# Altium PCB PCB5.PcbDoc
Units mil, origin at the board's own origin, x right, y up, seen from the top; angles counter-clockwise.
Board outline 6000 x 4000 mil, 2 copper layers (Top Layer, Bottom Layer); 16 components, 15 nets, 60 pads, 9 vias.
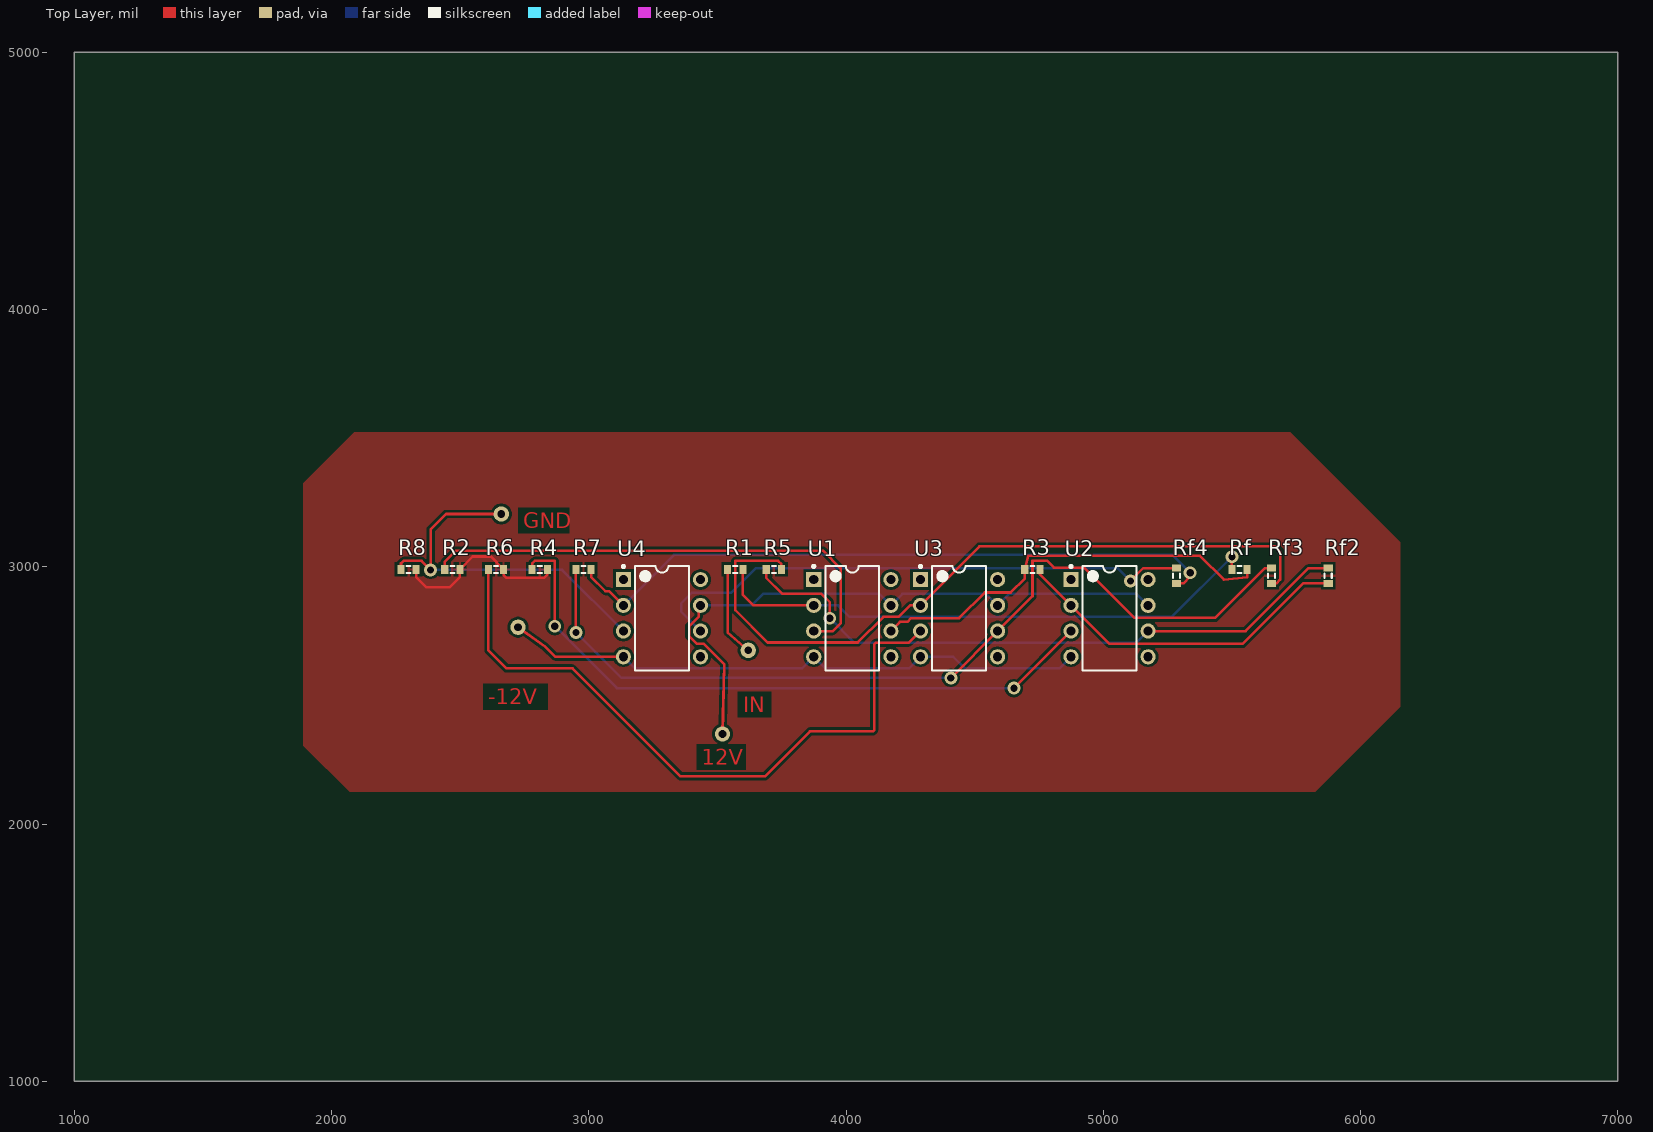
[diagram p0: Top Layer view]
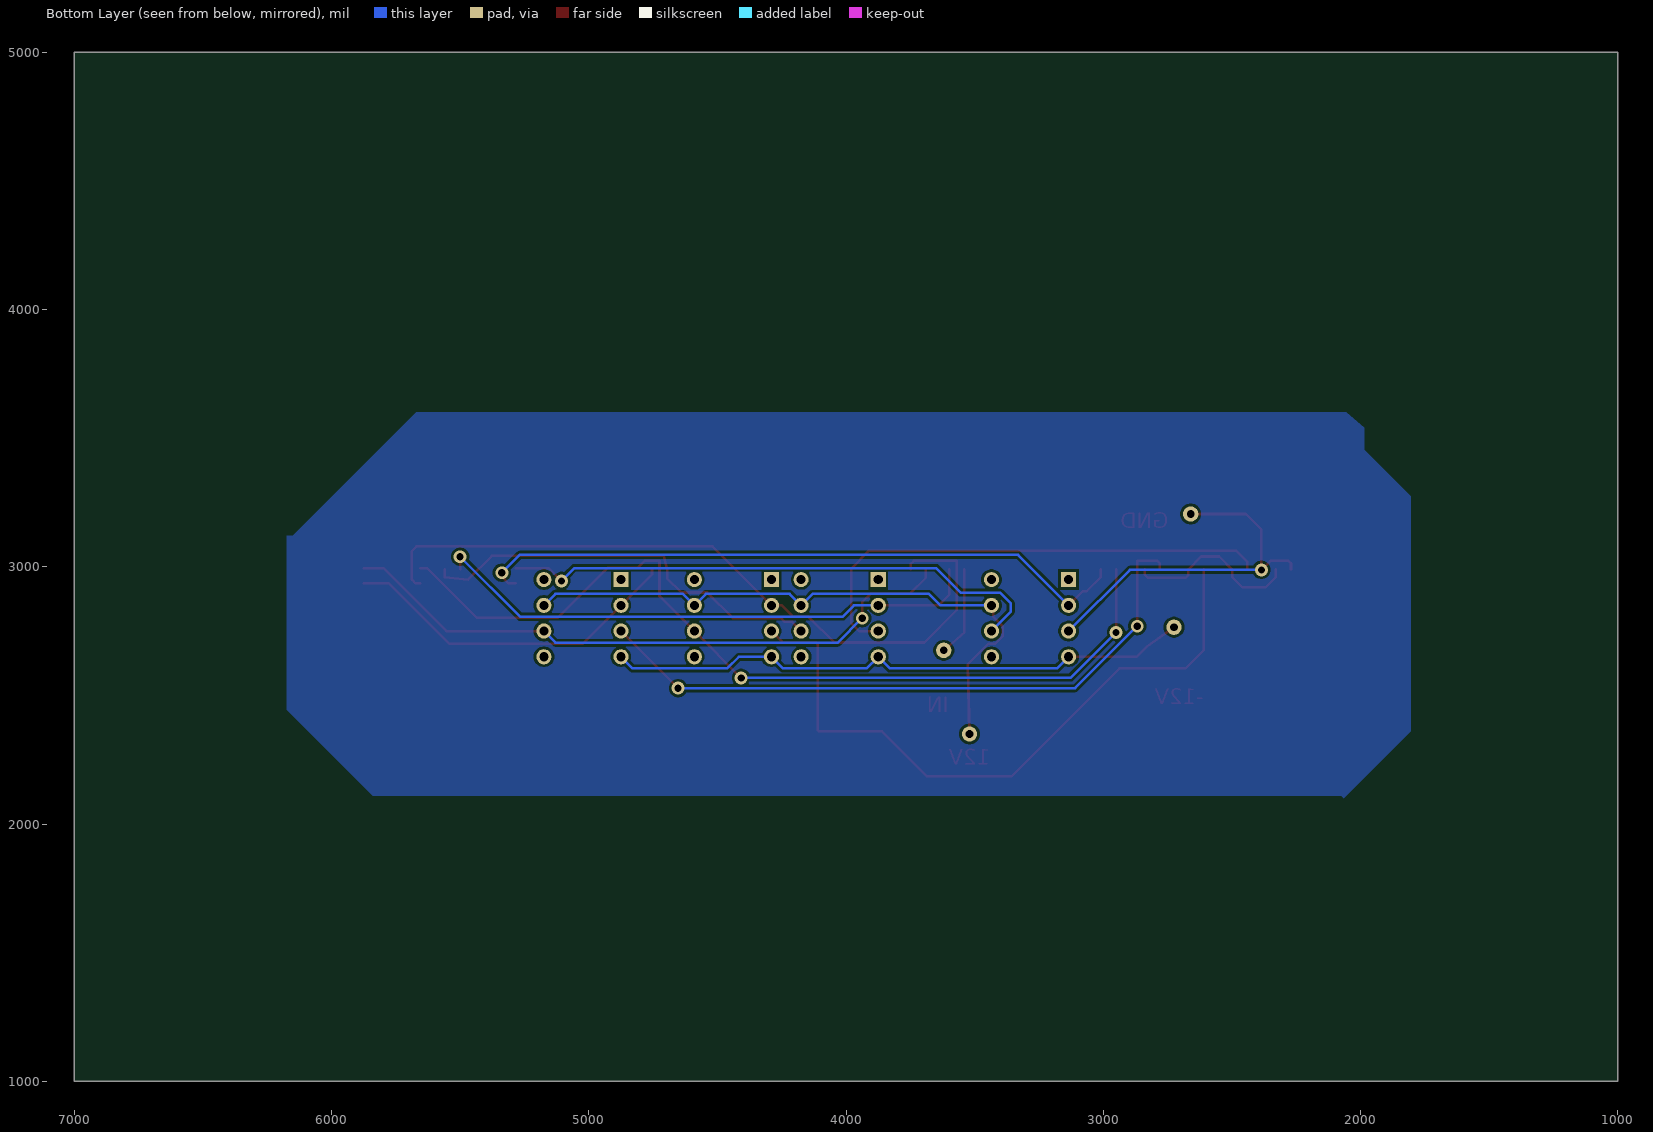
[diagram p1: Bottom Layer view, seen from below]

## Layer stack, top to bottom
Top Solder: solder mask 0.4, Solder Resist, Dk 3.5
Top Layer: signal copper 1.4
Dielectric 1: dielectric 12.6, FR-4, Dk 4.8
Bottom Layer: signal copper 1.4
Bottom Solder: solder mask 0.4, Solder Resist, Dk 3.5

## Board outline
1000,1000 7000,1000 7000,5000 1000,5000

## Design rules (kind name [scope] priority, off if disabled: settings)
Clearance [All] p1: gap=10 ignorepadtopadclearanceinfootprint=FALSE except(0: Arc-Hole Track-Hole SMDPad-Hole THPad-Hole Via-Hole Fill-Hole Poly-Hole Region-Hole Text-Hole)
PolygonConnect [All] p1: connectstyle=Relief reliefconductorwidth=10 reliefentries=4 polygonreliefangle="90 Angle" airgapwidth=10
RoomDefinition Sheet1 [InComponentClass('Sheet1')] p1: confinementstyle=ConfineIn formatcopy=TRUE lockcomponents=FALSE outline 2244.53,2585 6029.53,2585 6029.53,3120 2244.53,3120
RoutingVias [All] p1: holewidth=28 width=50 viastyle="Through Hole" minholewidth=28 minwidth=50 maxholewidth=28 maxwidth=50
SolderMaskExpansion [All] p1: expansion=4 istentingtop=FALSE
Width [All] p1: maxlimit=10 minlimit=10 preferedwidth=10
30 further rules are at their usual default settings.

## Components (designator, comment, footprint, x,y, rotation, side; value= is the part's Value field where it differs from the comment)
R1 "Res3" J1-0603 3569.53,2990 r0 top value=10K
R2 "Res3" J1-0603 2469.53,2990 r0 top value=9.1K
R3 "Res3" J1-0603 4724.53,2990 r0 top value=10K
R4 "Res3" J1-0603 2809.53,2990 r0 top value=9.1K
R5 "Res3" J1-0603 3719.53,2990 r0 top value=10K
R6 "Res3" J1-0603 2639.53,2990 r0 top value=9.1K
R7 "Res3" J1-0603 2979.53,2990 r0 top value=10K
R8 "Res3" J1-0603 2299.53,2990 r0 top value=9.1K
Rf "Res3" J1-0603 5529.53,2990 r0 top value=100K
Rf2 "Res3" J1-0603 5874.53,2965 r90 top value=100K
Rf3 "Res3" J1-0603 5654.53,2965 r90 top value=100K
Rf4 "Res3" J1-0603 5284.53,2965 r90 top value=100K
U1 "Op Amp" DIP-8 4024.53,2800 r0 top
U2 "Op Amp" DIP-8 5024.53,2800 r0 top
U3 "Op Amp" DIP-8 4439.53,2800 r0 top
U4 "Op Amp" DIP-8 3284.53,2800 r0 top

## Footprints (in the part's own frame and the unit in brackets; to place one, negate y for a bottom-side part, rotate by r counter-clockwise, add the part's x,y. Pads: shape width x height; smd on the part's side, far side on the other; paste and mask are expansions set on the pad)
DIP-8 [mm] "DIP; 8 Leads; Row Spacing 7.62 mm; Pitch 2.54 mm"
  rect 1.5x1.5 hole 0.9: 1(-3.81,3.81)
  round 1.5 hole 0.9: 2(-3.81,1.27) 3(-3.81,-1.27) 4(-3.81,-3.81) 5(3.81,-3.81) 6(3.81,-1.27) 7(3.81,1.27) 8(3.81,3.81)
  silkscreen extent -3.93,-5.15 2.65,5.23, body extent -3.6,-5.15 3.6,5.15, height 5.08
J1-0603 [mm] "Chip Resistor, Body 1.6x0.8mm, IPC High Density"
  rect 0.7x0.9 smd: 1(-0.75,0) 2(0.75,0)
  silkscreen extent -0.2,-0.35 0.2,0.35, body extent -0.85,-0.48 0.85,0.48, height 0.9

## Part data
R1 R2 R3 R4 R5 R6 R7 R8 Rf Rf2 Rf3 Rf4: "Resistor", LatestRevisionDate=29-May-2009, LatestRevisionNote="IPC-7351 Footprint Added.", PackageDescription="Chip Resistor", PackageReference=J1-0603, Published=8-Jun-2000, Publisher="Altium Limited"
U1 U2 U3 U4: "FET Operational Amplifier", ComponentLink1Description="Manufacturer Link", ComponentLink1URL=http://www.analog.com/, DatasheetVersion="REV. B", LatestRevisionDate=17-Jul-2002, LatestRevisionNote="Re-released for DXP Platform.", PackageDescription="Can; 8 Leads; Pin Circle Dia. 5.08 mm; Lead Dia. 0.53 mm (max)", PackageReference=H-08A, PackageVersion=1990, Published=8-Jun-2000, Publisher="Altium Limited"

## Free pads (board coordinates)
  round 60 hole 30: 3(2725,2765) 4(3520,2350) 6(3620,2675) 8(2660,3205)

## Via types
v1: diameter 50, hole 28, Top Layer to Bottom Layer, 9 vias

## Nets (pads, with @x,y where several pads share a name; then routed paths per layer and width w, separated by ;. In a path a pad name is that pad's centre, name@x,y a point inside that pad or via, vN(x,y) a via of type N, cw(c..) or ccw(c..) an arc to the next point about the centre after c; other vN are vias at no path point)
+12: pad.4 U1.7 U2.7 U3.7 U4.7 | length 2442
  Top Layer w10: U4.7 3427.03,2842.5 3427.03,2805.47 3390,2768.44 3390,2731.56 3421.56,2700 3447.5,2700 3526.25,2621.25 pad.4
  Bottom Layer w10: U4.7 3633,2850 3678,2895 4129.53,2895 U1.7 4219.53,2895 4544.53,2895 U3.7 4634.53,2895 5129.53,2895 U2.7
-12: pad.3 U1.4 U2.4 U3.4 U4.4 | length 2302
  Top Layer w10: pad.3 2830,2690 2870,2650 U4.4
  Bottom Layer w10: U4.4 3179.53,2605 3829.53,2605 U1.4 3919.53,2605 4244.53,2605 U3.4 4417,2650 4462,2605 4829.53,2605 U2.4
GND: R2.2 R4.2 R6.2 R8.2 | length 696.5
  Top Layer w10: R8.2 2329.06,2960 2369.06,2920 2459.06,2920 2499.06,2960 R2.2 2549.06,3040 2619.06,3040 R6.2 2669.06,2967.94 2680,2957 2826.06,2957 2839.06,2970 R4.2
NetR1_2: R1.2 Rf.1 U1.2 | length 2181.5
  Top Layer w10: R1.2 3599.06,2890.94 3640,2850 U1.2 ; Rf.1 v1(5500,3039)
  Bottom Layer w10: U1.2 3969.06,2850 4014.06,2805 5266,2805 v1(5500,3039)
NetR2_1: R2.1 U1.3 | length 1945.8
  Top Layer w10: R2.1 2440,3019 2484,3063 3910,3063 3979.06,2993.94 3979.06,2780 3949.06,2750 U1.3
NetR3_1: R3.1 Rf.2 U1.6 | length 1614.9
  Top Layer w10: U1.6 4210,2785.47 4239.06,2785.47 4253.58,2800 4440,2800 4540,2900 4640,2900 4695,2955 R3.1 4707.72,3042.72 5376.34,3042.72 5469.06,2950 5559.06,2960 Rf.2
NetR3_2: R3.2 Rf2.1 U2.2 | length 1349.6
  Top Layer w10: R3.2 4754.06,2970.47 U2.2 5024.53,2700 5542,2700 5777.47,2935.47 Rf2.1
NetR4_1: R4.1 U2.3 | length 2567.5
  Top Layer w10: R4.1 2780,3013 2790,3023 2868,3023 v1(2868,2769) ; v1(4652.53,2528) U2.3
  Bottom Layer w10: v1(2868,2769) 3109,2528 v1(4652.53,2528)
NetR5_1: R5.1 Rf2.2 U2.6 | length 2478.2
  Top Layer w10: R5.1 3690,2957 3752.47,2894.53 3904.53,2894.53 3937,2862.06 v1(3937,2800) ; U2.6 5553,2750 5797.53,2994.53 Rf2.2
  Bottom Layer w10: v1(3937,2800) 4032,2705 5129.53,2705 U2.6
NetR5_2: R5.2 Rf3.1 U3.2 | length 2879.1
  Top Layer w10: R5.2 3749.06,3010 3736.06,3023 3570,3023 3570,2831 3695.53,2705.47 4045.47,2705.47 4145.47,2805.47 4204.53,2805.47 4249.06,2850 U3.2 4518.53,3079 5670,3079 5688,3061 5688,2950 5673.47,2935.47 Rf3.1
NetR6_1: R6.1 U3.3 | length 2626.8
  Top Layer w10: R6.1 2610,2675 2680,2605 2936.64,2605 3356.64,2185 3685,2185 3860,2360 4104.14,2360 4110,2365.86 4110,2699.14 4115.86,2705 4244.53,2705 U3.3
NetR7_1: R7.1 Rf3.2 U3.6 | length 3463.6
  Top Layer w10: v1(2950,2745) R7.1 ; v1(4407.53,2568) U3.6 4725,2885.47 4725,3022.72 4783,3022.72 4808.72,2997 4925,2997 5121,2801 5435,2801 5628.53,2994.53 Rf3.2
  Bottom Layer w10: v1(2950,2745) 3127,2568 v1(4407.53,2568)
NetR7_2: R7.2 Rf4.1 U4.2 | length 2593.7
  Top Layer w10: R7.2 3009.06,2960 3064.06,2905 3079.53,2905 U4.2 ; Rf4.1 5311.47,2935.47 5338,2962 v1(5338,2977)
  Bottom Layer w10: U4.2 3330.53,3046 5269,3046 v1(5338,2977)
NetR8_1: pad.8 R8.1 U4.3 | length 1461.6
  Top Layer w10: R8.1 2270,3013 2280,3023 2350,3023 v1(2385,2988) 2385,3145 2445,3205 pad.8
  Bottom Layer w10: v1(2385,2988) 2896.53,2988 U4.3
NetRf4_2: Rf4.2 U4.6 | length 2161.7
  Top Layer w10: v1(5106,2945) 5155.53,2994.53 Rf4.2
  Bottom Layer w10: U4.6 3360,2824.53 3360,2858.53 3400,2898.53 3553.53,2898.53 3650,2995 5056,2995 v1(5106,2945)
pads on no net: R1.1 U1.1 U1.5 U1.8 U2.1 U2.5 U2.8 U3.1 U3.5 U3.8 U4.1 U4.5 U4.8
copper on no net: | length 351.3
  Top Layer w10: 3540,2990 3540,2745 3620,2675

## Polygon pours and split planes (outlines as drawn)
GND on Top Layer "GND_L01_P000" (solid, remove dead copper, pour order 0): 2085,3520 1890,3325 1890,2305 2070,2125 5825,2125 6155,2455 6155,3095 5726.47,3523.53 2083.09,3523.53
no net on Bottom Layer "NONET_L02_P001" (solid, pour order 1): 1985,3540 1985,3455 1805,3275 1805,2360 2065,2100 2075,2110 5840,2110 6175,2445 6175,3120 6150,3120 5670,3600 2055,3600

## Other copper
Top Layer:
  text "GND" at 2745,3150 h60
  text "-12V" at 2610,2465 h60
  text "IN" at 3600,2435 h60
  text "12V" at 3440,2230 h60

## Silkscreen, mask and mechanical layers (free items; w line width, h text height)
Mechanical 1:
  lines w10: 1760,3445 1760,2375 2050,2085 5860,2085 6185,2410 6185,3120 5675,3630 1935,3630 1760,3455